# Altium PCB pcb.PcbDoc (part 3 of 3)
Units mm, origin at the board's own origin, x right, y up, seen from the top; angles counter-clockwise.
Board outline 134 x 85 mm, 2 copper layers (Top Layer, Bottom Layer), stack 1.576 mm thick; 95 components, 38 nets, 258 pads, 1810 vias.
Unrouted connection lines stored in the file: 41.
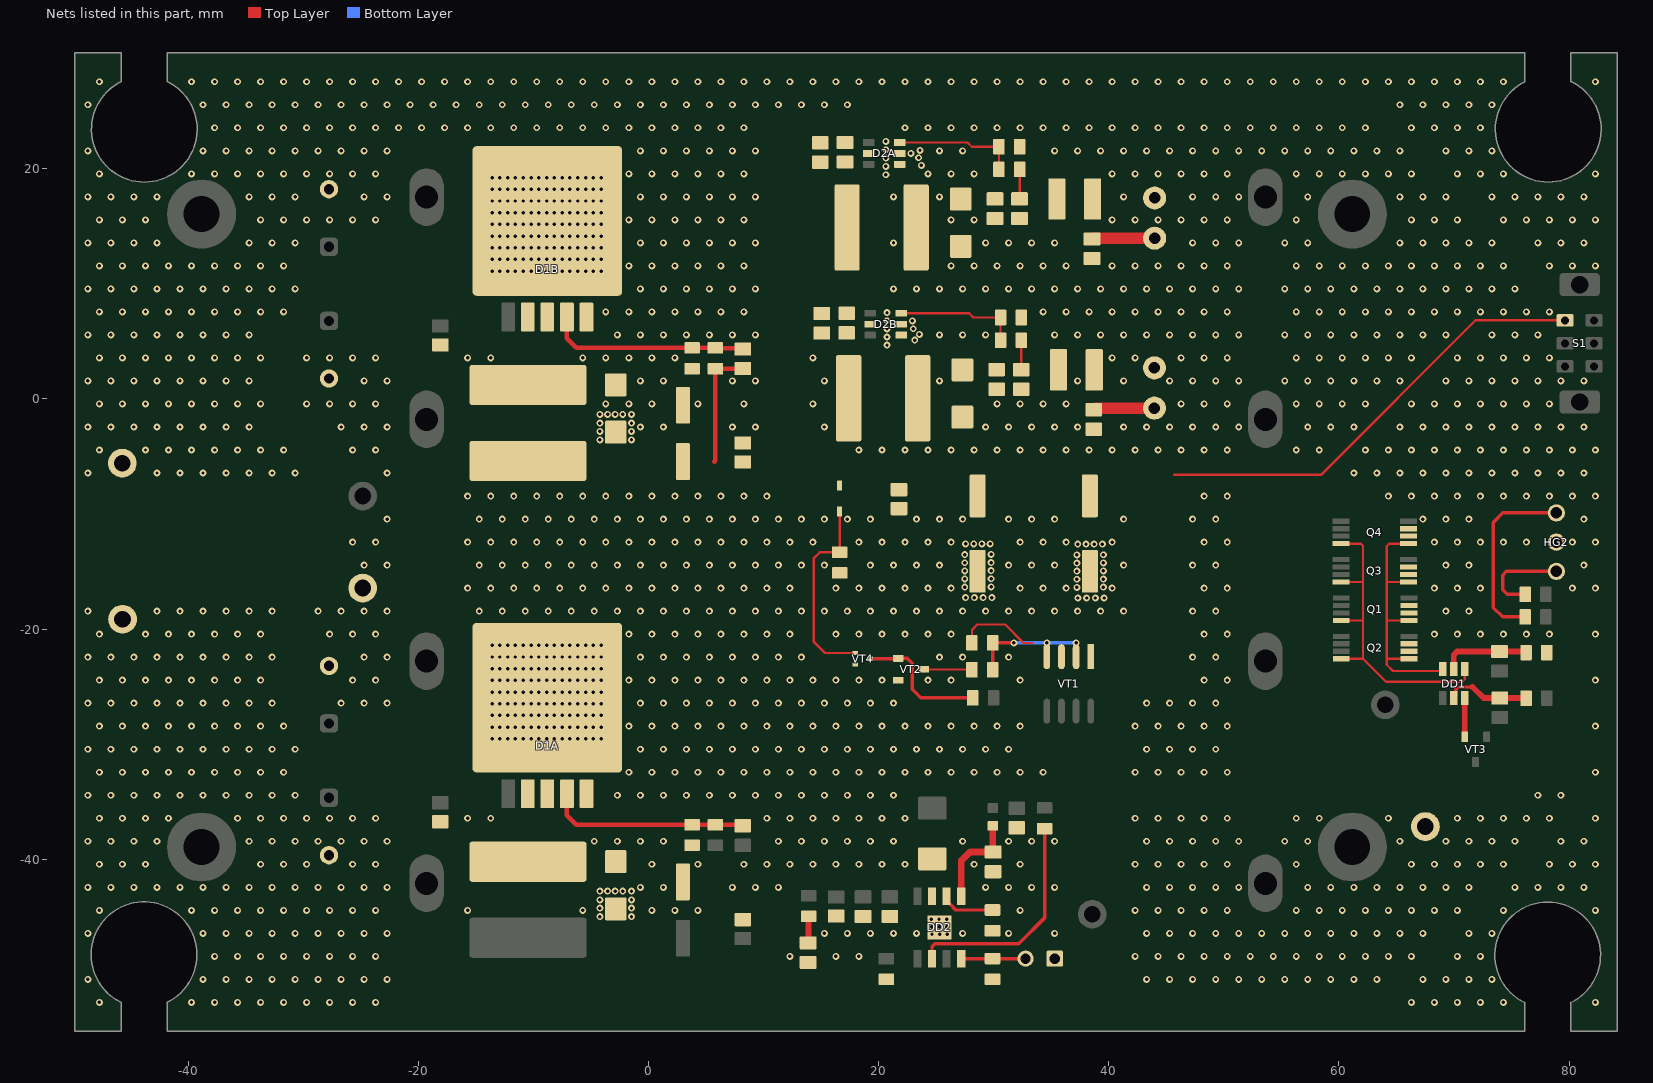
[diagram p2: the nets of this part, all layers, seen from the top]

## Via types
v1: diameter 0.6, hole 0.3, Top Layer to Bottom Layer, tented both sides, 1810 vias

## Nets (pads, with @x,y where several pads share a name; then routed paths per layer and width w, separated by ;. In a path a pad name is that pad's centre, name@x,y a point inside that pad or via, vN(x,y) a via of type N, cw(c..) or ccw(c..) an arc to the next point about the centre after c; other vN are vias at no path point) (continued)
GND: C1A.2 C1B.2 C2A.2 C2B.2 C3A.2 C3B.2 C4A.2 C4B.2 C5A.2 C5B.2 C8.2 C9.2 C10.2 C11.2 C12.2 C13.2 C14.2 C16A.2 C16B.2 C17A.2 C17B.2 C18.2 C20A.2 C20B.2 C21A.2 C21B.2 C22.2 C23A.2 C23B.2 D1A.3 D1A.5 D1A.6 D1B.3 D1B.5 D1B.6 D2A.2 D2B.2 DD2.9 FP4.1 FP7.1 FP12.1 FP13.1 HG2.CC J1.1 Q1.6 Q1.7 Q2.6 Q2.7 Q3.6 Q3.7 Q4.6 Q4.7 R2A.2 R2B.2 R5A.2 R5B.2 R12.1 R15.2 RICHG.1 RNTC.1 RVSET.1 VD1A.AN VD1B.AN VT2.2 VT4.2 X2.2 X3.2
  other v1: -47.708,-52.441 -39.708,-52.441 -37.708,-52.441 -35.708,-52.441 -33.708,-52.441 -31.708,-52.441 -29.708,-52.441 -27.708,-52.441 -25.708,-52.441 -23.708,-52.441 66.292,-52.441 68.292,-52.441 70.292,-52.441 72.292,-52.441 74.292,-52.441 82.292,-52.441 -48.708,-50.441 -38.708,-50.441 -36.708,-50.441 -34.708,-50.441 -32.708,-50.441 -30.708,-50.441 -28.708,-50.441 -26.708,-50.441 -24.708,-50.441 -22.708,-50.441 43.292,-50.441 45.292,-50.441 47.292,-50.441 49.292,-50.441 51.292,-50.441 53.292,-50.441 55.292,-50.441 57.292,-50.441 59.292,-50.441 61.292,-50.441 63.292,-50.441 67.292,-50.441 69.292,-50.441 71.292,-50.441 73.292,-50.441 -37.708,-48.441 -35.708,-48.441 -33.708,-48.441 -31.708,-48.441 -29.708,-48.441 -27.708,-48.441 -25.708,-48.441 -23.708,-48.441 12.292,-48.441 16.292,-48.441 18.292,-48.441 42.292,-48.441 44.292,-48.441 46.292,-48.441 48.292,-48.441 50.292,-48.441 52.292,-48.441 54.292,-48.441 56.292,-48.441 58.292,-48.441 60.292,-48.441 62.292,-48.441 64.292,-48.441 66.292,-48.441 70.292,-48.441 72.292,-48.441 24.638,-46.507 25.298,-46.507 25.959,-46.507 -48.708,-46.441 -38.708,-46.441 -36.708,-46.441 -34.708,-46.441 -32.708,-46.441 -30.708,-46.441 -28.708,-46.441 -26.708,-46.441 -24.708,-46.441 -22.708,-46.441 15.292,-46.441 17.292,-46.441 19.292,-46.441 21.292,-46.441 23.292,-46.441 27.292,-46.441 31.292,-46.441 35.292,-46.441 43.292,-46.441 45.292,-46.441 47.292,-46.441 49.292,-46.441 51.292,-46.441 53.292,-46.441 55.292,-46.441 57.292,-46.441 59.292,-46.441 61.292,-46.441 63.292,-46.441 65.292,-46.441 67.292,-46.441 71.292,-46.441 73.292,-46.441 24.613,-45.872 25.273,-45.872 25.933,-45.872 24.587,-45.212 25.248,-45.212 25.908,-45.212 -4.216,-44.983 -1.473,-44.983 -47.708,-44.441 -39.708,-44.441 -37.708,-44.441 -35.708,-44.441 -33.708,-44.441 -31.708,-44.441 -29.708,-44.441 -27.708,-44.441 -25.708,-44.441 -23.708,-44.441 -15.708,-44.441 -5.708,-44.441 0.292,-44.441 2.292,-44.441 4.292,-44.441 32.292,-44.441 42.292,-44.441 44.292,-44.441 46.292,-44.441 48.292,-44.441 50.292,-44.441 56.292,-44.441 58.292,-44.441 60.292,-44.441 62.292,-44.441 64.292,-44.441 66.292,-44.441 68.292,-44.441 70.292,-44.441 74.292,-44.441 82.292,-44.441 -4.216,-44.247 -1.473,-44.247 -4.216,-43.536 -1.473,-43.536 -4.216,-42.774 -3.556,-42.774 -2.896,-42.774 -2.235,-42.774 -1.473,-42.774 -48.708,-42.441 -46.708,-42.441 -44.708,-42.441 -42.708,-42.441 -40.708,-42.441 -38.708,-42.441 -36.708,-42.441 -34.708,-42.441 -32.708,-42.441 -30.708,-42.441 -28.708,-42.441 -26.708,-42.441 -24.708,-42.441 -22.708,-42.441 -0.708,-42.441 1.292,-42.441 7.292,-42.441 9.292,-42.441 11.292,-42.441 29.292,-42.441 31.292,-42.441 33.292,-42.441 35.292,-42.441 43.292,-42.441 45.292,-42.441 47.292,-42.441 49.292,-42.441 51.292,-42.441 57.292,-42.441 59.292,-42.441 61.292,-42.441 63.292,-42.441 65.292,-42.441 67.292,-42.441 69.292,-42.441 71.292,-42.441 75.292,-42.441 77.292,-42.441 79.292,-42.441 81.292,-42.441 -47.708,-40.441 -45.708,-40.441 -43.708,-40.441 -33.708,-40.441 -31.708,-40.441 -29.708,-40.441 -25.708,-40.441 -23.708,-40.441 0.292,-40.441 4.292,-40.441 8.292,-40.441 10.292,-40.441 12.292,-40.441 14.292,-40.441 16.292,-40.441 18.292,-40.441 20.292,-40.441 22.292,-40.441 28.292,-40.441 32.292,-40.441 42.292,-40.441 44.292,-40.441 46.292,-40.441 48.292,-40.441 50.292,-40.441 56.292,-40.441 66.292,-40.441 68.292,-40.441 70.292,-40.441 72.292,-40.441 74.292,-40.441 78.292,-40.441 80.292,-40.441 82.292,-40.441 -48.708,-38.441 -46.708,-38.441 -44.708,-38.441 -42.708,-38.441 -34.708,-38.441 -32.708,-38.441 -30.708,-38.441 -28.708,-38.441 -26.708,-38.441 -24.708,-38.441 -22.708,-38.441 -4.708,-38.441 -2.708,-38.441 -0.708,-38.441 1.292,-38.441 11.292,-38.441 13.292,-38.441 15.292,-38.441 17.292,-38.441 19.292,-38.441 21.292,-38.441 27.292,-38.441 31.292,-38.441 33.292,-38.441 35.292,-38.441 43.292,-38.441 45.292,-38.441 47.292,-38.441 49.292,-38.441 51.292,-38.441 55.292,-38.441 57.292,-38.441 65.292,-38.441 69.292,-38.441 71.292,-38.441 73.292,-38.441 75.292,-38.441 79.292,-38.441 81.292,-38.441 -47.708,-36.441 -45.708,-36.441 -43.708,-36.441 -41.708,-36.441 -35.708,-36.441 -33.708,-36.441 -31.708,-36.441 -29.708,-36.441 -27.708,-36.441 -25.708,-36.441 -23.708,-36.441 -15.708,-36.441 -13.708,-36.441 10.292,-36.441 12.292,-36.441 14.292,-36.441 16.292,-36.441 18.292,-36.441 20.292,-36.441 22.292,-36.441 42.292,-36.441 44.292,-36.441 46.292,-36.441 48.292,-36.441 50.292,-36.441 56.292,-36.441 58.292,-36.441 64.292,-36.441 70.292,-36.441 72.292,-36.441 74.292,-36.441 76.292,-36.441 78.292,-36.441 82.292,-36.441 -48.708,-34.441 -46.708,-34.441 -44.708,-34.441 -42.708,-34.441 -40.708,-34.441 -38.708,-34.441 -36.708,-34.441 -34.708,-34.441 -32.708,-34.441 -30.708,-34.441 -2.708,-34.441 -0.708,-34.441 1.292,-34.441 3.292,-34.441 5.292,-34.441 7.292,-34.441 9.292,-34.441 11.292,-34.441 13.292,-34.441 15.292,-34.441 17.292,-34.441 19.292,-34.441 21.292,-34.441 77.292,-34.441 79.292,-34.441 -47.708,-32.441 -45.708,-32.441 -43.708,-32.441 -41.708,-32.441 -39.708,-32.441 -37.708,-32.441 -35.708,-32.441 -33.708,-32.441 -31.708,-32.441 -1.708,-32.441 0.292,-32.441 2.292,-32.441 4.292,-32.441 6.292,-32.441 8.292,-32.441 10.292,-32.441 12.292,-32.441 14.292,-32.441 16.292,-32.441 18.292,-32.441 20.292,-32.441 22.292,-32.441 24.292,-32.441 26.292,-32.441 28.292,-32.441 30.292,-32.441 32.292,-32.441 34.292,-32.441 42.292,-32.441 44.292,-32.441 46.292,-32.441 48.292,-32.441 50.292,-32.441 82.292,-32.441 -48.708,-30.441 -46.708,-30.441 -44.708,-30.441 -42.708,-30.441 -40.708,-30.441 -38.708,-30.441 -36.708,-30.441 -34.708,-30.441 -32.708,-30.441 -30.708,-30.441 -0.708,-30.441 1.292,-30.441 3.292,-30.441 5.292,-30.441 7.292,-30.441 9.292,-30.441 11.292,-30.441 13.292,-30.441 15.292,-30.441 17.292,-30.441 19.292,-30.441 21.292,-30.441 23.292,-30.441 25.292,-30.441 27.292,-30.441 29.292,-30.441 31.292,-30.441 43.292,-30.441 45.292,-30.441 47.292,-30.441 49.292,-30.441 -13.589,-29.54 -12.912,-29.54 -12.236,-29.54 -11.559,-29.54 -10.882,-29.54 -10.205,-29.54 -9.529,-29.54 -8.852,-29.54 -8.175,-29.54 -7.498,-29.54 -6.822,-29.54 -6.145,-29.54 -5.468,-29.54 -4.792,-29.54 -4.115,-29.54 -13.589,-28.524 -12.912,-28.524 -12.236,-28.524 -11.559,-28.524 -10.882,-28.524 -10.205,-28.524 -9.529,-28.524 -8.852,-28.524 -8.175,-28.524 -7.498,-28.524 -6.822,-28.524 -6.145,-28.524 -5.468,-28.524 -4.792,-28.524 -4.115,-28.524 -47.708,-28.441 -45.708,-28.441 -43.708,-28.441 -41.708,-28.441 -39.708,-28.441 -37.708,-28.441 -35.708,-28.441 -33.708,-28.441 -31.708,-28.441 -1.708,-28.441 0.292,-28.441 2.292,-28.441 4.292,-28.441 6.292,-28.441 8.292,-28.441 10.292,-28.441 12.292,-28.441 14.292,-28.441 16.292,-28.441 18.292,-28.441 20.292,-28.441 22.292,-28.441 24.292,-28.441 26.292,-28.441 28.292,-28.441 30.292,-28.441 32.292,-28.441 42.292,-28.441 44.292,-28.441 46.292,-28.441 48.292,-28.441 50.292,-28.441 82.292,-28.441 -13.589,-27.508 -12.912,-27.508 -12.236,-27.508 -11.559,-27.508 -10.882,-27.508 -10.205,-27.508 -9.529,-27.508 -8.852,-27.508 -8.175,-27.508 -7.498,-27.508 -6.822,-27.508 -6.145,-27.508 -5.468,-27.508 -4.792,-27.508 -4.115,-27.508 -13.589,-26.492 -12.912,-26.492 -12.236,-26.492 -11.559,-26.492 -10.882,-26.492 -10.205,-26.492 -9.529,-26.492 -8.852,-26.492 -8.175,-26.492 -7.498,-26.492 -6.822,-26.492 -6.145,-26.492 -5.468,-26.492 -4.792,-26.492 -4.115,-26.492 -48.708,-26.441 -46.708,-26.441 -44.708,-26.441 -42.708,-26.441 -40.708,-26.441 -38.708,-26.441 -36.708,-26.441 -34.708,-26.441 -32.708,-26.441 -26.708,-26.441 -24.708,-26.441 -22.708,-26.441 -0.708,-26.441 1.292,-26.441 3.292,-26.441 5.292,-26.441 7.292,-26.441 9.292,-26.441 11.292,-26.441 13.292,-26.441 15.292,-26.441 17.292,-26.441 19.292,-26.441 21.292,-26.441 43.292,-26.441 45.292,-26.441 47.292,-26.441 49.292,-26.441 -13.589,-25.476 -12.912,-25.476 -12.236,-25.476 -11.559,-25.476 -10.882,-25.476 -10.205,-25.476 -9.529,-25.476 -8.852,-25.476 -8.175,-25.476 -7.498,-25.476 -6.822,-25.476 -6.145,-25.476 -5.468,-25.476 -4.792,-25.476 -4.115,-25.476 -47.708,-24.441 -45.708,-24.441 -43.708,-24.441 -41.708,-24.441 -39.708,-24.441 -37.708,-24.441 -35.708,-24.441 -33.708,-24.441 -25.708,-24.441 -23.708,-24.441 -13.589,-24.46 -12.912,-24.46 -12.236,-24.46 -11.559,-24.46 -10.882,-24.46 -10.205,-24.46 -9.529,-24.46 -8.852,-24.46 -8.175,-24.46 -7.498,-24.46 -6.822,-24.46 -6.145,-24.46 -5.468,-24.46 -4.792,-24.46 -4.115,-24.46 -1.708,-24.441 0.292,-24.441 2.292,-24.441 4.292,-24.441 6.292,-24.441 8.292,-24.441 10.292,-24.441 12.292,-24.441 14.292,-24.441 16.292,-24.441 18.292,-24.441 20.292,-24.441 24.292,-24.441 26.292,-24.441 32.292,-24.441 48.292,-24.441 50.292,-24.441 82.292,-24.441 -13.589,-23.444 -12.912,-23.444 -12.236,-23.444 -11.559,-23.444 -10.882,-23.444 -10.205,-23.444 -9.529,-23.444 -8.852,-23.444 -8.175,-23.444 -7.498,-23.444 -6.822,-23.444 -6.145,-23.444 -5.468,-23.444 -4.792,-23.444 -4.115,-23.444 -48.708,-22.441 -46.708,-22.441 -44.708,-22.441 -42.708,-22.441 -40.708,-22.441 -38.708,-22.441 -36.708,-22.441 -34.708,-22.441 -32.708,-22.441 -24.708,-22.441 -22.708,-22.441 -0.708,-22.441 1.292,-22.441 3.292,-22.441 5.292,-22.441 7.292,-22.441 9.292,-22.441 11.292,-22.441 13.292,-22.441 25.292,-22.441 27.292,-22.441 31.292,-22.441 47.292,-22.441 49.292,-22.441 -13.589,-22.428 -12.912,-22.428 -12.236,-22.428 -11.559,-22.428 -10.882,-22.428 -10.205,-22.428 -9.529,-22.428 -8.852,-22.428 -8.175,-22.428 -7.498,-22.428 -6.822,-22.428 -6.145,-22.428 -5.468,-22.428 -4.792,-22.428 -4.115,-22.428 -13.589,-21.412 -12.912,-21.412 -12.236,-21.412 -11.559,-21.412 -10.882,-21.412 -10.205,-21.412 -9.529,-21.412 -8.852,-21.412 -8.175,-21.412 -7.498,-21.412 -6.822,-21.412 -6.145,-21.412 -5.468,-21.412 -4.792,-21.412 -4.115,-21.412 -47.708,-20.441 -43.708,-20.441 -41.708,-20.441 -39.708,-20.441 -37.708,-20.441 -35.708,-20.441 -33.708,-20.441 -27.708,-20.441 -25.708,-20.441 -23.708,-20.441 -1.708,-20.441 0.292,-20.441 2.292,-20.441 4.292,-20.441 6.292,-20.441 8.292,-20.441 10.292,-20.441 12.292,-20.441 16.292,-20.441 18.292,-20.441 20.292,-20.441 22.292,-20.441 24.292,-20.441 26.292,-20.441 48.292,-20.441 50.292,-20.441 68.292,-20.441 70.292,-20.441 72.292,-20.441 74.292,-20.441 76.292,-20.441 78.292,-20.441 82.292,-20.441 -48.708,-18.441 -42.708,-18.441 -40.708,-18.441 -38.708,-18.441 -36.708,-18.441 -34.708,-18.441 -32.708,-18.441 -28.708,-18.441 -26.708,-18.441 -24.708,-18.441 -22.708,-18.441 -14.708,-18.441 -12.708,-18.441 -10.708,-18.441 -8.708,-18.441 -6.708,-18.441 -4.708,-18.441 -2.708,-18.441 -0.708,-18.441 1.292,-18.441 3.292,-18.441 5.292,-18.441 7.292,-18.441 9.292,-18.441 11.292,-18.441 13.292,-18.441 15.292,-18.441 17.292,-18.441 19.292,-18.441 21.292,-18.441 23.292,-18.441 25.292,-18.441 27.292,-18.441 29.292,-18.441 31.292,-18.441 33.292,-18.441 35.292,-18.441 37.292,-18.441 39.292,-18.441 41.292,-18.441 47.292,-18.441 49.292,-18.441 69.292,-18.441 71.292,-18.441 37.313,-17.301 38.075,-17.301 38.837,-17.301 39.599,-17.301 27.559,-17.272 28.321,-17.272 29.083,-17.272 29.845,-17.272 -15.708,-16.441 -13.708,-16.441 -11.708,-16.441 -9.708,-16.441 -7.708,-16.441 -5.708,-16.441 -3.708,-16.441 -1.708,-16.441 0.292,-16.441 2.292,-16.441 4.292,-16.441 6.292,-16.441 8.292,-16.441 10.292,-16.441 12.292,-16.441 16.292,-16.441 18.292,-16.441 20.292,-16.441 22.292,-16.441 24.292,-16.441 26.292,-16.441 32.292,-16.441 34.292,-16.441 36.292,-16.441 40.292,-16.441 48.292,-16.441 50.292,-16.441 68.292,-16.441 70.292,-16.441 72.292,-16.441 80.292,-16.441 82.292,-16.441 37.236,-16.38 27.483,-16.351 39.528,-16.358 29.775,-16.329 37.236,-15.675 39.528,-15.655 27.483,-15.646 29.775,-15.626 37.236,-14.97 27.483,-14.942 39.528,-14.952 29.775,-14.923 -24.708,-14.441 -22.708,-14.441 -14.708,-14.441 -12.708,-14.441 -10.708,-14.441 -8.708,-14.441 -6.708,-14.441 -4.708,-14.441 -2.708,-14.441 -0.708,-14.441 1.292,-14.441 3.292,-14.441 5.292,-14.441 7.292,-14.441 9.292,-14.441 11.292,-14.441 13.292,-14.441 15.292,-14.441 19.292,-14.441 21.292,-14.441 23.292,-14.441 25.292,-14.441 31.292,-14.441 33.292,-14.441 35.292,-14.441 41.292,-14.441 47.292,-14.441 49.292,-14.441 69.292,-14.441 71.292,-14.441 81.292,-14.441 37.236,-14.266 27.483,-14.237 39.528,-14.249 29.775,-14.22 37.236,-13.561 39.528,-13.546 27.483,-13.532 29.775,-13.518 37.306,-12.624 38.019,-12.624 38.733,-12.624 39.446,-12.624 27.552,-12.595 28.266,-12.595 28.979,-12.595 29.693,-12.595 -25.708,-12.441 -23.708,-12.441 -15.708,-12.441 -13.708,-12.441 -11.708,-12.441 -9.708,-12.441 -7.708,-12.441 -5.708,-12.441 -3.708,-12.441 -1.708,-12.441 0.292,-12.441 2.292,-12.441 4.292,-12.441 6.292,-12.441 8.292,-12.441 10.292,-12.441 12.292,-12.441 14.292,-12.441 18.292,-12.441 20.292,-12.441 22.292,-12.441 24.292,-12.441 26.292,-12.441 32.292,-12.441 34.292,-12.441 36.292,-12.441 40.292,-12.441 48.292,-12.441 50.292,-12.441 68.292,-12.441 70.292,-12.441 72.292,-12.441 74.292,-12.441 76.292,-12.441 80.292,-12.441 82.292,-12.441 -22.708,-10.441 -14.708,-10.441 -12.708,-10.441 -10.708,-10.441 -8.708,-10.441 -6.708,-10.441 -4.708,-10.441 -2.708,-10.441 -0.708,-10.441 1.292,-10.441 3.292,-10.441 5.292,-10.441 7.292,-10.441 9.292,-10.441 11.292,-10.441 13.292,-10.441 15.292,-10.441 17.292,-10.441 19.292,-10.441 23.292,-10.441 25.292,-10.441 27.292,-10.441 31.292,-10.441 33.292,-10.441 35.292,-10.441 41.292,-10.441 47.292,-10.441 49.292,-10.441 67.292,-10.441 69.292,-10.441 71.292,-10.441 81.292,-10.441 -15.708,-8.441 -13.708,-8.441 -11.708,-8.441 -9.708,-8.441 -7.708,-8.441 -5.708,-8.441 -3.708,-8.441 -1.708,-8.441 0.292,-8.441 2.292,-8.441 4.292,-8.441 6.292,-8.441 8.292,-8.441 10.292,-8.441 48.292,-8.441 50.292,-8.441 64.292,-8.441 66.292,-8.441 68.292,-8.441 70.292,-8.441 72.292,-8.441 74.292,-8.441 76.292,-8.441 78.292,-8.441 80.292,-8.441 82.292,-8.441 -48.708,-6.441 -42.708,-6.441 -40.708,-6.441 -38.708,-6.441 -36.708,-6.441 -34.708,-6.441 -32.708,-6.441 -30.708,-6.441 -22.708,-6.441 61.292,-6.441 63.292,-6.441 65.292,-6.441 67.292,-6.441 69.292,-6.441 71.292,-6.441 73.292,-6.441 75.292,-6.441 77.292,-6.441 79.292,-6.441 81.292,-6.441 -47.708,-4.441 -43.708,-4.441 -41.708,-4.441 -39.708,-4.441 -37.708,-4.441 -35.708,-4.441 -33.708,-4.441 -31.708,-4.441 -25.708,-4.441 -23.708,-4.441 18.292,-4.441 20.292,-4.441 22.292,-4.441 24.292,-4.441 26.292,-4.441 28.292,-4.441 30.292,-4.441 32.292,-4.441 34.292,-4.441 36.292,-4.441 38.292,-4.441 40.292,-4.441 42.292,-4.441 44.292,-4.441 46.292,-4.441 48.292,-4.441 50.292,-4.441 56.292,-4.441 58.292,-4.441 62.292,-4.441 64.292,-4.441 66.292,-4.441 68.292,-4.441 70.292,-4.441 72.292,-4.441 74.292,-4.441 76.292,-4.441 78.292,-4.441 80.292,-4.441 82.292,-4.441 -4.216,-3.556 -1.473,-3.556 -4.216,-2.819 -1.473,-2.819 -48.708,-2.441 -46.708,-2.441 -44.708,-2.441 -42.708,-2.441 -40.708,-2.441 -38.708,-2.441 -36.708,-2.441 -34.708,-2.441 -26.708,-2.441 -24.708,-2.441 -22.708,-2.441 -0.708,-2.441 1.292,-2.441 7.292,-2.441 9.292,-2.441 15.292,-2.441 29.292,-2.441 31.292,-2.441 33.292,-2.441 35.292,-2.441 37.292,-2.441 41.292,-2.441 43.292,-2.441 45.292,-2.441 47.292,-2.441 49.292,-2.441 51.292,-2.441 57.292,-2.441 59.292,-2.441 61.292,-2.441 65.292,-2.441 67.292,-2.441 69.292,-2.441 71.292,-2.441 73.292,-2.441 75.292,-2.441 77.292,-2.441 79.292,-2.441 81.292,-2.441 -4.216,-2.108 -1.473,-2.108 -4.216,-1.346 -3.556,-1.346 -2.896,-1.346 -2.235,-1.346 -1.473,-1.346 -47.708,-0.441 -45.708,-0.441 -43.708,-0.441 -41.708,-0.441 -39.708,-0.441 -37.708,-0.441 -35.708,-0.441 -33.708,-0.441 -29.708,-0.441 -27.708,-0.441 -25.708,-0.441 -23.708,-0.441 -3.708,-0.441 -1.708,-0.441 0.292,-0.441 4.292,-0.441 8.292,-0.441 14.292,-0.441 30.292,-0.441 32.292,-0.441 34.292,-0.441 36.292,-0.441 46.292,-0.441 48.292,-0.441 50.292,-0.441 56.292,-0.441 58.292,-0.441 60.292,-0.441 62.292,-0.441 66.292,-0.441 68.292,-0.441 70.292,-0.441 72.292,-0.441 74.292,-0.441 76.292,-0.441 78.292,-0.441 -48.708,1.559 -46.708,1.559 -44.708,1.559 -42.708,1.559 -40.708,1.559 -38.708,1.559 -36.708,1.559 -34.708,1.559 -24.708,1.559 -22.708,1.559 -0.708,1.559 1.292,1.559 7.292,1.559 9.292,1.559 15.292,1.559 25.292,1.559 37.292,1.559 41.292,1.559 45.292,1.559 47.292,1.559 49.292,1.559 51.292,1.559 55.292,1.559 57.292,1.559 59.292,1.559 61.292,1.559 63.292,1.559 65.292,1.559 69.292,1.559 71.292,1.559 73.292,1.559 75.292,1.559 77.292,1.559 79.292,1.559 81.292,1.559 -47.708,3.559 -45.708,3.559 -43.708,3.559 -41.708,3.559 -39.708,3.559 -37.708,3.559 -35.708,3.559 -33.708,3.559 -29.708,3.559 -27.708,3.559 -25.708,3.559 -23.708,3.559 -15.708,3.559 -13.708,3.559 -5.708,3.559 -3.708,3.559 -1.708,3.559 0.292,3.559 2.292,3.559 14.292,3.559 40.292,3.559 42.292,3.559 46.292,3.559 48.292,3.559 50.292,3.559 56.292,3.559 58.292,3.559 60.292,3.559 62.292,3.559 64.292,3.559 66.292,3.559 70.292,3.559 72.292,3.559 74.292,3.559 76.292,3.559 78.292,3.559 20.726,4.674 23.139,5.105 20.726,5.378 -48.708,5.559 -46.708,5.559 -44.708,5.559 -42.708,5.559 -40.708,5.559 -38.708,5.559 -36.708,5.559 -34.708,5.559 -2.708,5.559 -0.708,5.559 1.292,5.559 3.292,5.559 5.292,5.559 7.292,5.559 9.292,5.559 25.292,5.559 27.292,5.559 29.292,5.559 35.292,5.559 37.292,5.559 39.292,5.559 41.292,5.559 43.292,5.559 45.292,5.559 47.292,5.559 49.292,5.559 51.292,5.559 55.292,5.559 57.292,5.559 59.292,5.559 61.292,5.559 63.292,5.559 65.292,5.559 67.292,5.559 69.292,5.559 73.292,5.559 75.292,5.559 77.292,5.559 23.546,5.613 20.726,6.083 23.012,6.096 20.726,6.788 22.936,6.782 20.726,7.493 -47.708,7.559 -45.708,7.559 -43.708,7.559 -41.708,7.559 -39.708,7.559 -37.708,7.559 -35.708,7.559 -33.708,7.559 -31.708,7.559 -3.708,7.559 -1.708,7.559 0.292,7.559 2.292,7.559 4.292,7.559 6.292,7.559 8.292,7.559 34.292,7.559 36.292,7.559 38.292,7.559 40.292,7.559 42.292,7.559 44.292,7.559 46.292,7.559 48.292,7.559 50.292,7.559 56.292,7.559 58.292,7.559 60.292,7.559 62.292,7.559 64.292,7.559 66.292,7.559 68.292,7.559 70.292,7.559 72.292,7.559 74.292,7.559 76.292,7.559 78.292,7.559 -48.708,9.559 -46.708,9.559 -44.708,9.559 -42.708,9.559 -40.708,9.559 -38.708,9.559 -36.708,9.559 -34.708,9.559 -32.708,9.559 -30.708,9.559 -0.708,9.559 1.292,9.559 3.292,9.559 5.292,9.559 7.292,9.559 9.292,9.559 21.292,9.559 23.292,9.559 25.292,9.559 27.292,9.559 29.292,9.559 31.292,9.559 33.292,9.559 35.292,9.559 37.292,9.559 39.292,9.559 41.292,9.559 43.292,9.559 45.292,9.559 47.292,9.559 49.292,9.559 51.292,9.559 55.292,9.559 57.292,9.559 59.292,9.559 61.292,9.559 63.292,9.559 65.292,9.559 67.292,9.559 69.292,9.559 71.292,9.559 73.292,9.559 75.292,9.559 -13.589,11.1 -12.912,11.1 -12.236,11.1 -11.559,11.1 -10.882,11.1 -10.205,11.1 -9.529,11.1 -8.852,11.1 -8.175,11.1 -7.498,11.1 -6.822,11.1 -6.145,11.1 -5.468,11.1 -4.792,11.1 -4.115,11.1 -47.708,11.559 -45.708,11.559 -43.708,11.559 -41.708,11.559 -39.708,11.559 -37.708,11.559 -35.708,11.559 -33.708,11.559 -31.708,11.559 -1.708,11.559 0.292,11.559 2.292,11.559 4.292,11.559 6.292,11.559 8.292,11.559 26.292,11.559 28.292,11.559 30.292,11.559 32.292,11.559 34.292,11.559 36.292,11.559 40.292,11.559 42.292,11.559 44.292,11.559 46.292,11.559 48.292,11.559 50.292,11.559 56.292,11.559 58.292,11.559 60.292,11.559 62.292,11.559 64.292,11.559 66.292,11.559 68.292,11.559 70.292,11.559 72.292,11.559 74.292,11.559 78.292,11.559 80.292,11.559 82.292,11.559 -13.589,12.116 -12.912,12.116 -12.236,12.116 -11.559,12.116 -10.882,12.116 -10.205,12.116 -9.529,12.116 -8.852,12.116 -8.175,12.116 -7.498,12.116 -6.822,12.116 -6.145,12.116 -5.468,12.116 -4.792,12.116 -4.115,12.116 -13.589,13.132 -12.912,13.132 -12.236,13.132 -11.559,13.132 -10.882,13.132 -10.205,13.132 -9.529,13.132 -8.852,13.132 -8.175,13.132 -7.498,13.132 -6.822,13.132 -6.145,13.132 -5.468,13.132 -4.792,13.132 -4.115,13.132 -48.708,13.559 -46.708,13.559 -44.708,13.559 -42.708,13.559 -34.708,13.559 -32.708,13.559 -30.708,13.559 -0.708,13.559 1.292,13.559 3.292,13.559 5.292,13.559 7.292,13.559 9.292,13.559 21.292,13.559 29.292,13.559 31.292,13.559 33.292,13.559 35.292,13.559 47.292,13.559 49.292,13.559 51.292,13.559 55.292,13.559 57.292,13.559 65.292,13.559 67.292,13.559 69.292,13.559 71.292,13.559 73.292,13.559 77.292,13.559 79.292,13.559 81.292,13.559 -13.589,14.148 -12.912,14.148 -12.236,14.148 -11.559,14.148 -10.882,14.148 -10.205,14.148 -9.529,14.148 -8.852,14.148 -8.175,14.148 -7.498,14.148 -6.822,14.148 -6.145,14.148 -5.468,14.148 -4.792,14.148 -4.115,14.148 -13.589,15.164 -12.912,15.164 -12.236,15.164 -11.559,15.164 -10.882,15.164 -10.205,15.164 -9.529,15.164 -8.852,15.164 -8.175,15.164 -7.498,15.164 -6.822,15.164 -6.145,15.164 -5.468,15.164 -4.792,15.164 -4.115,15.164 -47.708,15.559 -45.708,15.559 -43.708,15.559 -33.708,15.559 -31.708,15.559 -29.708,15.559 -27.708,15.559 -25.708,15.559 -23.708,15.559 -1.708,15.559 0.292,15.559 2.292,15.559 4.292,15.559 6.292,15.559 8.292,15.559 26.292,15.559 28.292,15.559 40.292,15.559 42.292,15.559 44.292,15.559 46.292,15.559 48.292,15.559 50.292,15.559 56.292,15.559 66.292,15.559 68.292,15.559 70.292,15.559 74.292,15.559 76.292,15.559 78.292,15.559 80.292,15.559 82.292,15.559 -13.589,16.18 -12.912,16.18 -12.236,16.18 -11.559,16.18 -10.882,16.18 -10.205,16.18 -9.529,16.18 -8.852,16.18 -8.175,16.18 -7.498,16.18 -6.822,16.18 -6.145,16.18 -5.468,16.18 -4.792,16.18 -4.115,16.18 -13.589,17.196 -12.912,17.196 -12.236,17.196 -11.559,17.196 -10.882,17.196 -10.205,17.196 -9.529,17.196 -8.852,17.196 -8.175,17.196 -7.498,17.196 -6.822,17.196 -6.145,17.196 -5.468,17.196 -4.792,17.196 -4.115,17.196 -48.708,17.559 -46.708,17.559 -44.708,17.559 -42.708,17.559 -34.708,17.559 -32.708,17.559 -30.708,17.559 -24.708,17.559 -22.708,17.559 -0.708,17.559 1.292,17.559 3.292,17.559 5.292,17.559 7.292,17.559 9.292,17.559 21.292,17.559 25.292,17.559 41.292,17.559 47.292,17.559 49.292,17.559 51.292,17.559 57.292,17.559 65.292,17.559 67.292,17.559 69.292,17.559 73.292,17.559 75.292,17.559 77.292,17.559 79.292,17.559 81.292,17.559 -13.589,18.212 -12.912,18.212 -12.236,18.212 -11.559,18.212 -10.882,18.212 -10.205,18.212 -9.529,18.212 -8.852,18.212 -8.175,18.212 -7.498,18.212 -6.822,18.212 -6.145,18.212 -5.468,18.212 -4.792,18.212 -4.115,18.212 -13.589,19.228 -12.912,19.228 -12.236,19.228 -11.559,19.228 -10.882,19.228 -10.205,19.228 -9.529,19.228 -8.852,19.228 -8.175,19.228 -7.498,19.228 -6.822,19.228 -6.145,19.228 -5.468,19.228 -4.792,19.228 -4.115,19.228 20.625,19.482 -47.708,19.559 -39.708,19.559 -37.708,19.559 -35.708,19.559 -33.708,19.559 -31.708,19.559 -29.708,19.559 -27.708,19.559 -25.708,19.559 -23.708,19.559 -1.708,19.559 0.292,19.559 2.292,19.559 4.292,19.559 6.292,19.559 8.292,19.559 24.292,19.559 26.292,19.559 28.292,19.559 40.292,19.559 42.292,19.559 44.292,19.559 46.292,19.559 48.292,19.559 50.292,19.559 56.292,19.559 58.292,19.559 60.292,19.559 62.292,19.559 64.292,19.559 66.292,19.559 70.292,19.559 72.292,19.559 74.292,19.559 82.292,19.559 20.625,20.206 23.724,20.295 20.625,20.93 23.47,20.955 22.809,21.336 -48.708,21.559 -38.708,21.559 -36.708,21.559 -34.708,21.559 -32.708,21.559 -30.708,21.559 -28.708,21.559 -26.708,21.559 -24.708,21.559 -22.708,21.559 -0.708,21.559 1.292,21.559 3.292,21.559 5.292,21.559 7.292,21.559 9.292,21.559 25.292,21.559 27.292,21.559 35.292,21.559 37.292,21.559 39.292,21.559 41.292,21.559 43.292,21.559 45.292,21.559 47.292,21.559 49.292,21.559 51.292,21.559 53.292,21.559 55.292,21.559 57.292,21.559 59.292,21.559 61.292,21.559 63.292,21.559 65.292,21.559 69.292,21.559 71.292,21.559 73.292,21.559 23.597,21.59 20.625,21.653 20.625,22.377 -37.708,23.559 -35.708,23.559 -33.708,23.559 -31.708,23.559 -29.708,23.559 -27.708,23.559 -25.708,23.559 -23.708,23.559 -21.708,23.559 -19.708,23.559 -17.708,23.559 -15.708,23.559 -13.708,23.559 -11.708,23.559 -9.708,23.559 -7.708,23.559 -5.708,23.559 -3.708,23.559 -1.708,23.559 0.292,23.559 2.292,23.559 4.292,23.559 6.292,23.559 8.292,23.559 22.292,23.559 24.292,23.559 26.292,23.559 28.292,23.559 30.292,23.559 32.292,23.559 34.292,23.559 36.292,23.559 38.292,23.559 40.292,23.559 42.292,23.559 44.292,23.559 46.292,23.559 48.292,23.559 50.292,23.559 52.292,23.559 54.292,23.559 56.292,23.559 58.292,23.559 60.292,23.559 62.292,23.559 66.292,23.559 68.292,23.559 70.292,23.559 72.292,23.559 -48.708,25.559 -38.708,25.559 -36.708,25.559 -34.708,25.559 -32.708,25.559 -30.708,25.559 -28.708,25.559 -26.708,25.559 -24.708,25.559 -22.708,25.559 -20.708,25.559 -18.708,25.559 -16.708,25.559 -14.708,25.559 -12.708,25.559 -10.708,25.559 -8.708,25.559 -6.708,25.559 -4.708,25.559 -2.708,25.559 -0.708,25.559 1.292,25.559 3.292,25.559 5.292,25.559 7.292,25.559 9.292,25.559 11.292,25.559 13.292,25.559 15.292,25.559 17.292,25.559 65.292,25.559 67.292,25.559 69.292,25.559 71.292,25.559 73.292,25.559 -47.708,27.559 -39.708,27.559 -37.708,27.559 -35.708,27.559 -33.708,27.559 -31.708,27.559 -29.708,27.559 -27.708,27.559 -25.708,27.559 -23.708,27.559 -21.708,27.559 -19.708,27.559 -17.708,27.559 -15.708,27.559 -13.708,27.559 -11.708,27.559 -9.708,27.559 -7.708,27.559 -5.708,27.559 -3.708,27.559 -1.708,27.559 0.292,27.559 2.292,27.559 4.292,27.559 6.292,27.559 8.292,27.559 10.292,27.559 12.292,27.559 14.292,27.559 16.292,27.559 18.292,27.559 20.292,27.559 22.292,27.559 24.292,27.559 26.292,27.559 28.292,27.559 30.292,27.559 32.292,27.559 34.292,27.559 36.292,27.559 38.292,27.559 40.292,27.559 42.292,27.559 44.292,27.559 46.292,27.559 48.292,27.559 50.292,27.559 52.292,27.559 54.292,27.559 56.292,27.559 58.292,27.559 60.292,27.559 62.292,27.559 64.292,27.559 66.292,27.559 68.292,27.559 70.292,27.559 72.292,27.559 74.292,27.559 82.292,27.559
ICHG: DD2.6 RICHG.2 | length 4.7
  Top Layer w0.3: DD2.6@25.908,-43.211 25.908,-43.624 26.108,-43.824 26.12,-43.824 26.71,-44.414 RICHG.2@29.897,-44.414
MODEM_PWR: C5B.1 L4B.2 X2.1 | length 5.3
  Top Layer w1: C5B.1@38.684,-0.942 38.824,-0.802 X2.1@43.967,-0.802
NetC3A_1: C3A.1 C4A.1 L4A.1 R1A.1 VD2A.CA | length 2.6
  Top Layer w0.2: C3A.1@32.245,17.383 32.256,17.394 R1A.1@32.256,19.936
NetC3B_1: C3B.1 C4B.1 L4B.1 R1B.1 VD2B.CA | length 2.6
  Top Layer w0.2: C3B.1@32.385,2.538 32.396,2.549 R1B.1@32.396,5.092
NetC7_2: C7.2 DD1.2 R12.2 | length 7.6
  Top Layer w0.5: DD1.2@69.972,-23.484 69.972,-22.246 70.265,-21.953 76.121,-21.953 R12.2@76.209,-22.041
NetC12_1: C12.1 R7.2 | length 2.3
  Top Layer w0.5: C12.1@13.868,-47.271 13.91,-46.796 13.91,-45.37 R7.2@13.918,-44.97
NetC13_1: C13.1 DD2.5 R9.2 | length 8.4
  Top Layer w0.6: DD2.5@27.178,-43.211 27.178,-40.157 27.952,-39.384 C13.1@29.947,-39.384 29.921,-39.358 R9.2@29.921,-37.097
NetC15_2: C15.2 DD1.5 R11.1 | length 7.4
  Top Layer w0.3: DD1.5@69.972,-25.984 70.147,-25.809 70.147,-25.21 70.323,-25.034 71.617,-25.034 ; R11.1@76.248,-25.992 R11.1@76.26,-26.004
  Top Layer w0.5: 71.617,-25.034 72.576,-25.992 R11.1@76.248,-25.992
NetC19A_1: C19A.1 D1A.4 R4A.2 R5A.1 | length 17.5
  Top Layer w0.4: D1A.4@-7.088,-34.316 -7.088,-36.168 -6.259,-36.997 R5A.1@3.785,-36.997 R4A.2@5.817,-36.997 5.835,-37.015 8.122,-37.015 C19A.1@8.204,-37.097
NetC19B_1: C19B.1 D1B.4 R4B.2 R5B.1 | length 17.5
  Top Layer w0.4: D1B.4@-7.088,7.111 -7.088,5.26 -6.259,4.431 R5B.1@3.785,4.431 R4B.2@5.817,4.431 5.835,4.412 8.122,4.412 C19B.1@8.204,4.331
NetD1A_2: D1A.2 L3A.1 VD1A.CA
NetD1B_2: D1B.2 L3B.1 VD1B.CA
NetD2A_1: D2A.1 L1A.2 VD2A.AN
NetD2A_3: D2A.3 R1A.2 R2A.1 | length 10.8
  Top Layer w0.2: D2A.3@21.835,22.283 27.727,22.283 28.093,21.918 R2A.1@30.456,21.918 R1A.2@30.456,19.936
NetD2B_1: D2B.1 L1B.2 VD2B.AN
NetD2B_3: D2B.3 R1B.2 R2B.1 | length 10.8
  Top Layer w0.2: D2B.3@21.975,7.439 27.867,7.439 28.233,7.073 R2B.1@30.596,7.073 R1B.2@30.596,5.092
NetDD1_1: DD1.1 Q1.4 Q2.4 Q3.4 Q4.4 | length 28.2
  Top Layer w0.2: Q3.4@60.176,-15.904 62.098,-15.904 ; Q4.4@60.176,-12.577 61.904,-12.577 62.098,-12.77 62.098,-15.904 ; Q2.4@60.201,-22.585 62.098,-22.585 ; Q1.4@60.201,-19.257 62.087,-19.257 62.098,-19.268 ; DD1.1@70.922,-23.484 70.922,-24.368 70.708,-24.581 64.095,-24.581 62.098,-22.585 ; 62.098,-22.585 62.098,-19.268 ; 62.098,-19.268 62.098,-15.904
NetDD1_3: DD1.3 Q1.5 Q2.5 Q3.5 Q4.5 | length 23.2
  Top Layer w0.2: 64.267,-19.257 Q1.5@66.077,-19.257 ; Q3.5@66.052,-15.904 64.155,-15.904 ; Q4.5@66.052,-12.577 64.374,-12.577 64.155,-12.796 64.155,-15.904 ; Q2.5@66.077,-22.585 64.171,-22.585 64.155,-22.6 ; DD1.3@69.2,-23.642 64.689,-23.642 64.155,-23.108 64.155,-22.6 ; 64.155,-22.6 64.155,-15.904
NetDD1_6: DD1.6 VT3.2 | length 3.4
  Top Layer w0.2: DD1.6@70.922,-25.984 DD1.6@70.932,-25.994
  Top Layer w0.5: VT3.2@70.932,-29.355 DD1.6@70.932,-25.994
NetDD2_7: DD2.7 L2.1
NetHG2_A1: HG2.A1 R6.1 | length 8.2
  Top Layer w0.3: R6.1@76.189,-16.993 74.625,-16.993 74.219,-16.586 74.219,-15.316 74.549,-14.986 HG2.A1@78.892,-14.986
NetHG2_A2: HG2.A2 R8.1 | length 16.3
  Top Layer w0.3: R8.1@76.189,-18.948 74.219,-18.948 73.406,-18.136 73.406,-10.744 74.244,-9.906 HG2.A2@78.892,-9.906
NetR3_2: R3.2 R10.1 VT1.2 VT1.4 | length 9.6
  Top Layer w0.3: R10.1@29.907,-23.546 R3.2@29.907,-21.209 v1(31.75,-21.209)
  Bottom Layer w0.3: v1(31.75,-21.209) v1(34.62,-21.209) v1(37.16,-21.209)
NetR10_2: R10.2 VT2.3 | length 4.2
  Top Layer w0.2: VT2.3@23.935,-23.52 R10.2@28.081,-23.52
  Top Layer w0.5: VT2.3@23.909,-23.495 VT2.3@23.935,-23.52 ; R10.2@28.081,-23.52 R10.2@28.107,-23.546
NetR14_2: R14.2 VT2.1 VT4.3 | length 11.7
  Top Layer w0.3: VT4.3@19.268,-22.581 19.286,-22.563 21.691,-22.563 VT2.1@21.709,-22.545 22.469,-22.545 22.911,-22.987 22.911,-25.222 23.673,-25.984 R14.2@28.183,-25.984
NetR15_1: R15.1 VD3.AN VT4.1 | length 17.3
  Top Layer w0.2: VD3.AN@16.612,-9.786 R15.1@16.612,-13.324 14.895,-13.324 14.351,-13.868 14.351,-21.082 15.35,-22.081 VT4.1@17.968,-22.081
NTC: DD2.4 J1.2 RNTC.2 | length 5.6
  Top Layer w0.2: DD2.4@27.178,-48.635 DD2.4@27.184,-48.641
  Top Layer w0.3: DD2.4@27.184,-48.641 J1.2@32.766,-48.641
ROUTER_PWR: C5A.1 L4A.2 X3.1 | length 5.5
  Top Layer w0.2: C5A.1@38.544,13.903 C5A.1@38.603,13.962
  Top Layer w1: C5A.1@38.603,13.962 X3.1@43.985,13.962 X3.1@43.966,13.943
STEP_UP_IN: C1A.1 C1B.1 C2A.1 C2B.1 C8.1 C17B.1 C18.1 C19B.2 C22.1 C23B.1 D2A.5 D2B.5 L1A.1 L1B.1 L3B.2 R3.1 R4B.1 S1.4 VD3.CA VT1.1 VT1.3 | length 57.3
  Top Layer w0.2: R3.1@28.107,-21.209 28.107,-20.077 28.575,-19.609 30.998,-19.609 32.599,-21.209 33.341,-21.209 ; 45.669,-6.604 58.445,-6.604 71.875,6.826 S1.4@79.649,6.826
  Top Layer w0.4: 5.74,-5.436 5.817,-5.359 R4B.1@5.817,2.631 C19B.2@8.204,2.631
TEST: DD2.2 R13.1 | length 19.6
  Top Layer w0.3: DD2.2@24.638,-48.635 24.638,-47.6 24.879,-47.358 32.169,-47.358 34.417,-45.11 R13.1@34.417,-37.349
pads on no net: D2A.6 D2B.6 DD1.4 Q1.1 Q1.8 Q2.1 Q2.8 Q3.1 Q3.8 Q4.1 Q4.8 S1.1 S1.2 S1.3 S1.6 S1.7

## Polygon pours and split planes (outlines as drawn)
GND on Top Layer "NONET_L-01_P-001" (solid, pour order 76): -49.835,30.06 -49.835,-54.94 84.165,-54.94 84.165,30.06
BGND on Top Layer "NONET_L-01_P-001" (solid, pour order 63): 51.165,-8.94 63.165,-8.94 63.165,-22.94 80.165,-22.94 80.165,-31.94 51.165,-31.94
STEP_UP_IN on Top Layer "NONET_L-01_P-001" (solid, pour order 62): 32.969,-20.396 32.969,-24.46 46.685,-24.46 46.685,-5.156 41.605,-5.156 41.605,-8.204 42.113,-8.712 42.113,-20.396
+4V2_BAT on Top Layer "NONET_L-01_P-001" (solid, pour order 60): 32.969,-25.73 40.996,-25.73 40.996,-36.144 36.017,-36.144 36.017,-30.556 32.969,-30.556
STEP_UP_IN on Top Layer "NONET_L-01_P-001" (solid, pour order 69): 15.596,21.692 13.767,21.692 13.767,-2.083 16.84,-5.156 42.24,-5.156 42.24,-8.204 11.633,-8.204 10.592,-7.163 10.592,23.8 15.596,23.8
STEP_UP_IN on Top Layer "NONET_L-01_P-001" (solid, pour order 65): 16.141,11.289 16.141,18.629 16.954,19.442 18.097,19.442 18.097,21.677 14.185,21.677 14.185,23.8 20.078,23.8 20.078,18.909 18.376,17.207 18.376,11.187 18.3,11.111 16.243,11.111
STEP_UP_IN on Top Layer "NONET_L-01_P-001" (solid, pour order 68): 16.281,-3.556 16.281,3.785 17.094,4.597 18.237,4.597 18.237,6.833 13.614,6.833 13.614,8.611 20.168,8.611 20.168,4.013 18.517,2.362 18.517,-3.658 18.44,-3.734 16.383,-3.734
5V_CHARGER on Top Layer "NONET_L-01_P-001" (solid, pour order 74): 7.518,-46.33 8.331,-46.33 12.649,-42.012 23.698,-42.012 23.698,-44.069 13.97,-44.069 9.398,-48.641 7.518,-48.641
+4V2_BAT on Top Layer "NONET_L-01_P-001" (solid, pour order 75): 22.86,-32.982 22.86,-36.779 26.238,-36.779 26.238,-36.322 40.691,-36.297 40.996,-36.297 40.996,-32.956
BGND on Bottom Layer "NONET_L-01_P-001" (solid, pour order 59): 51.165,-8.94 63.165,-8.94 63.165,-22.94 80.165,-22.94 80.165,-31.94 51.165,-31.94
+4V2_BAT on Bottom Layer "NONET_L-01_P-001" (solid, pour order 64): -21.562,21.184 -16.662,21.184 -16.662,-47.65 -14.173,-50.14 33.122,-50.14 36.601,-50.14 36.601,-44.882 36.601,-32.969 40.996,-32.969 40.996,-54.661 39.649,-54.661 37.516,-54.661 -22.047,-54.661 -22.047,-43.688
GND on Bottom Layer "NONET_L-01_P-001" (solid, pour order 70): -49.835,30.06 -49.835,-54.94 84.165,-54.94 84.165,30.06
no net on Top Solder "NONET_L-01_P-001" (solid): -15.342,21.311 -2.235,21.311 -2.235,29.693 -15.342,29.693
no net on Top Solder "NONET_L-01_P-001" (solid): -15.291,-19.888 -2.261,-19.888 -2.261,-10.871 -15.291,-10.871
no net on Bottom Solder "NONET_L-01_P-001" (solid, pour order 77): 21.285,-42.24 29.413,-42.24 29.413,-49.86 21.285,-49.86

## Other copper
Top Layer:
  region net STEP_UP_IN: -15.164,-3.632 ccw(c-15.164,-4.013) -15.545,-4.013 -15.545,-6.934 ccw(c-15.291,-6.934) -15.291,-7.188 10.693,-7.188 10.693,-4.902 -4.75,-4.902 cw(c-4.75,-4.267) -5.385,-4.267 -5.385,-3.886 ccw(c-5.639,-3.886) -5.639,-3.632
  region net 5V_CHARGER: -15.164,-45.06 ccw(c-15.164,-45.441) -15.545,-45.441 -15.545,-48.362 ccw(c-15.291,-48.362) -15.291,-48.616 8.839,-48.616 8.839,-46.33 -4.75,-46.33 cw(c-4.75,-45.695) -5.385,-45.695 -5.385,-45.314 ccw(c-5.639,-45.314) -5.639,-45.06
  region net 5V_CHARGER: -15.519,-45.06 ccw(c-15.519,-45.441) -15.9,-45.441 -15.9,-48.362 ccw(c-15.646,-48.362) -15.646,-48.616 8.484,-48.616 ccw(c8.484,-48.108) 8.992,-48.108 8.992,-46.965 ccw(c8.357,-46.965) 8.357,-46.33 -5.105,-46.33 cw(c-5.105,-45.695) -5.74,-45.695 -5.74,-45.314 ccw(c-5.994,-45.314) -5.994,-45.06
  region net NetD1B_2: -11.1,8.56 -11.1,5.385 -13.513,2.972 -15.291,2.972 -15.418,2.845 -15.418,-0.584 -5.385,-0.584 -5.385,0.178 -1.956,0.178 -1.956,2.21 -5.385,2.21 -5.385,2.972 -7.417,2.972 -9.83,5.385 -9.83,8.56
  region net MODEM_PWR: 37.897,4.039 37.897,4.318 37.922,4.343 39.395,4.343 39.472,4.267 39.472,-1.448 39.37,-1.549 38.024,-1.549 37.897,-1.422
  region net NetC3B_1: 26.314,3.531 26.314,1.626 26.416,1.524 29.134,1.524 29.566,1.956 33.731,1.956 34.976,0.711 36.347,0.711 36.347,4.267 36.271,4.343 34.29,4.343 33.452,3.505 28.219,3.505
  pour cut-out: -14.284,-3.334 -6.918,-3.334 -6.918,-0.816 -14.284,-0.816
  region net NetD1A_2: -11.1,-32.868 -11.1,-36.043 -13.513,-38.456 -15.291,-38.456 -15.418,-38.583 -15.418,-42.012 -5.385,-42.012 -5.385,-41.25 -1.956,-41.25 -1.956,-39.218 -5.385,-39.218 -5.385,-38.456 -7.417,-38.456 -9.83,-36.043 -9.83,-32.868
  region net NetD1A_2: -11.1,-32.868 -11.1,-36.043 -13.513,-38.456 -15.291,-38.456 -15.418,-38.583 -15.418,-42.012 -5.385,-42.012 -5.385,-41.25 -1.956,-41.25 -1.956,-39.218 -5.385,-39.218 -5.385,-38.456 -7.417,-38.456 -9.83,-36.043 -9.83,-32.868
  region net NetD2A_1: 21.272,20.687 22.39,20.687 22.39,19.62 23.355,18.655 24.371,18.655 24.371,14.308 28.113,14.308 28.113,12.254 24.371,12.254 24.371,11.136 22.212,11.136 22.161,11.187 22.161,18.502 21.272,19.391
  pour cut-out: 19.253,17.704 19.253,11.1 20.777,11.1 20.777,17.704
  pour cut-out: 22.746,-38.684 26.429,-38.684 26.429,-36.906 22.746,-36.906
  region net NetDD2_7: 24.282,-43.967 24.282,-41.859 23.419,-40.996 23.419,-39.014 23.47,-39.014 23.52,-38.964 25.832,-38.964 25.933,-39.065 25.933,-40.919 24.994,-41.859 24.994,-43.967
  region net 12V_EXT: -29.515,-27.008 -29.515,-35.623 -21.62,-35.623 -12.751,-35.623 -11.582,-35.623 -11.582,-33.456 -11.769,-33.071 -15.197,-33.071 -21.26,-27.008 -23.165,-27.008
  region net 12V_EXT: -29.515,-27.008 -29.515,-35.623 -21.62,-35.623 -12.751,-35.623 -11.612,-35.623 -11.612,-33.096 -15.171,-33.096 -21.26,-27.008 -23.165,-27.008
  region net 12V_EXT: -29.515,14.42 -29.515,5.805 -21.62,5.805 -12.751,5.805 -11.612,5.805 -11.612,8.331 -15.171,8.331 -21.26,14.42 -23.165,14.42
  pour cut-out: -14.148,-44.78 -6.782,-44.78 -6.782,-42.262 -14.148,-42.262
  pour cut-out: -49.835,-7.44 -26.835,-7.44 -26.835,-17.44 -49.835,-17.44
  region net NetC3A_1: 26.174,18.375 26.174,16.47 26.276,16.369 28.994,16.369 29.425,16.8 33.591,16.8 34.836,15.556 36.207,15.556 36.207,19.112 36.131,19.188 34.15,19.188 33.312,18.35 28.079,18.35
  region net ROUTER_PWR: 37.757,18.883 37.757,19.163 37.782,19.188 39.255,19.188 39.331,19.112 39.331,13.397 39.23,13.295 37.884,13.295 37.757,13.422
  region net NetD2B_1: 21.412,5.842 22.53,5.842 22.53,4.775 23.495,3.81 24.511,3.81 24.511,-0.537 28.253,-0.537 28.253,-2.591 24.511,-2.591 24.511,-3.708 22.352,-3.708 22.301,-3.658 22.301,3.658 21.412,4.547
  pour cut-out: 19.761,3.48 19.761,-3.886 21.031,-3.886 21.031,3.48
  pour cut-out: 19.761,2.972 19.761,-3.886 21.031,-3.886 21.031,2.972
Bottom Layer:
  pour cut-out: 22.746,-38.684 26.429,-38.684 26.429,-36.906 22.746,-36.906
  pour cut-out: 19.761,2.972 19.761,-3.886 21.031,-3.886 21.031,2.972
  pour cut-out: 19.253,17.704 19.253,11.1 20.777,11.1 20.777,17.704
  pour cut-out: -14.148,-44.78 -6.782,-44.78 -6.782,-42.262 -14.148,-42.262
  pour cut-out: -14.275,-3.378 -6.909,-3.378 -6.909,-0.86 -14.275,-0.86

## Silkscreen, mask and mechanical layers (free items; w line width, h text height)
Top Overlay:
  text "Uout1" at 41.123,20.015 h1.52
  text "Uout2" at 40.564,4.953 h1.52
Top Solder:
  text "-" at 50.598,16.51 h3 r90
  text "+" at 50.538,13.056 h3 r90
  text "-" at 50.572,1.829 h3 r90
  text "+" at 50.639,-1.803 h3 r90
  text "+" at -20.756,-9.186 h2 r90
  text "12V" at -24.581,-13.186 h2
  text "-" at -21.438,-15.383 h2 r180
  text "@vitech_ua" at -46.422,-41.186 h2 r90
  text "WiFi-UPSv3" at -43.089,-41.186 h2 r90
  text "02/2025 Kyiv" at -33.273,-42.686 h2 r90
  text "4V2" at 39.472,-47.981 h2
Bottom Solder:
  text "BAT-" at 60.858,6.325 h3 r90
  text "BAT+" at -27.158,-14.345 h3
Board:
  lines w0.254: -41.835,27.559 -41.835,30.06 75.165,30.06 76.165,30.06 76.165,27.559 ccw(c78.19,23.435) 80.215,27.559 ; -41.786,27.559 cw(c-43.81,23.435) -45.835,27.559 -45.835,30.06 -49.835,30.06 -49.835,29.06 -49.835,-53.94 -49.835,-54.94 ; 76.116,-52.451 cw(c78.141,-48.327) 80.165,-52.451 80.165,-54.94 84.165,-54.94 84.165,27.06 84.165,30.06 80.165,30.06 80.165,27.559 ; 76.165,-52.44 76.165,-54.94 -41.835,-54.94 -41.835,-52.44 ccw(c-43.835,-48.304) -45.835,-52.44 -45.835,-54.94 -49.835,-54.94 ; -49.835,-54.94 -49.835,-54.94
Title:
  lines w0.1: 108.8,111.4 176.75,111.4
  lines w0.127: -134.879,-77.998 -129.799,-77.998 ; -134.879,-7.513 -129.799,-7.513 ; -134.879,62.972 -129.799,62.972 ; -85.603,-148.483 -85.603,-143.403 ; -85.603,128.377 -85.603,133.457 ; -36.454,-148.483 -36.454,-143.403 ; -36.454,128.377 -36.454,133.457 ; 12.695,-148.483 12.695,-143.403 ; 61.971,-148.483 61.971,-143.403 ; 104.725,-143.375 104.725,-113.375 253.725,-113.375 ; 104.725,-138.375 253.725,-138.375 ; 104.725,-133.375 253.725,-133.375 ; 104.725,-123.375 253.725,-123.375 ; 111.12,-148.483 111.12,-143.403 ; 111.12,128.377 111.12,133.457 ; 119.725,-133.375 119.725,-123.375 ; 160.269,-148.483 160.269,-143.403 ; 160.269,128.377 160.269,133.457 ; 189.725,-143.375 189.725,-133.375 ; 209.545,-148.483 209.545,-143.403 ; 209.545,128.377 209.545,133.457 ; 238.725,-133.375 238.725,-123.375 ; 253.741,-77.998 258.821,-77.998 ; 253.741,-7.513 258.821,-7.513 ; 253.741,62.972 258.821,62.972 ; -134.879,-148.483 258.821,-148.483 258.821,133.457 -134.879,133.457 -134.879,-148.483 ; -129.799,-143.403 253.741,-143.403 253.741,128.377 -129.799,128.377 -129.799,-143.403
  text "1" at -110.842,130.028 h1.78
  text "2" at -61.803,130.028 h1.78
  text "3" at -12.544,130.028 h1.78
  text "5" at 86.025,130.028 h1.78
  text "6" at 135.047,130.028 h1.78
  text "7" at 184.577,130.028 h1.78
  text "8" at 233.599,130.028 h1.78
  text "NOTES: UNLESS OTHERWISE SPECIFIED." at 110.2,112.45 h2.5
  text "1. MATERIAL:BASE MATERIAL LAMINATED EPOXY GLASS (ANY COLOR)" at 110.35,106.4 h2.5
  text "GRADE NEMA FR-4. ALL SIDES 1 OZ COPPER PER MIL-P-13949." at 116.95,101.9 h2.5
  text "AND IS UL APPROVED MFR SOURCE WITH 1.6 mm +-10 PERCENT" at 116.95,98.2 h2.5
  text "A" at -132.974,96.043 h1.78
  text "A" at 255.646,96.043 h1.78
  text "2. SOLDER PLATE PER QQ-S-571." at 110.35,93.9 h2.5
  text "3. SILKSCREEN IS ABSENT." at 110.35,89.9 h2.5
  text "4. DIMENSIONS IN MILLIMETERS, (...) - FOR REFERENCE," at 110.3,85 h2.5
  text "TOLERANCE ARE: +-0.15; HOLES: +- 0.05." at 117.45,80.95 h2.5
  text "5. LIQUID PHOTO IMAGABLE SOLDERMASK ENTHRONE DSR3241" at 110.35,76.9 h2.5
  text "OR ALTERNATIVE." at 117.45,72.95 h2.5
  text "6.  FOR REF ONLY: THIS BOARD HAS SMD ON BOTH SIDES." at 110.35,68.9 h2.5
  text "7.  THE FINISH OF THE BOARD IS HASL." at 110.2,62.5 h2.5
  text "8. PCB stackup:" at 110.2,56.8 h2.5
  text "B" at -132.974,25.431 h1.78
  text "B" at 255.646,25.431 h1.78
  text "C" at -132.974,-45.181 h1.78
  text "C" at 255.646,-45.181 h1.78
  text "D" at -132.974,-115.285 h1.78
  text "D" at 255.646,-115.285 h1.78
  text "TITLE:" at 105.7,-115.8 h1.2
  text "SIZE:" at 105.7,-125.55 h1.2
  text "DWG NO:" at 120.7,-125.55 h1.2
  text "REV:" at 240.2,-125.55 h1.2
  text ".Project_Version" at 245.4,-126.7 h2.5
  text "A3" at 111.7,-130.3 h2.5
  text "DATE:" at 105.7,-135.55 h1.2
  text "PCB DESIGNER:" at 191.2,-135.55 h1.2
  text ".PRINT_DATE" at 119.2,-136.8 h2.5
  text "FILE NAME:" at 105.7,-140.55 h1.2
  text "SHEET:" at 190.95,-140.55 h1.2
  text ".PCB_FILE_NAME_NO_PATH" at 119.2,-141.8 h2.5
  text "1 OF 1" at 208.95,-142.05 h2.5
  text "1" at -110.842,-146.832 h1.78
  text "2" at -61.803,-146.832 h1.78
  text "3" at -12.544,-146.832 h1.78
  text "4" at 36.749,-146.832 h1.78
  text "5" at 86.025,-146.832 h1.78
  text "6" at 135.047,-146.832 h1.78
  text "7" at 184.577,-146.832 h1.78
  text "8" at 233.599,-146.832 h1.78

## Dimensions
78.892,-12.446 to 84.165,-54.94 on Dimensions
78.892,-12.446 to 84.165,30.06 on Dimensions
-38.835,16.06 to -38.835,-38.94 on Dimensions
-38.835,-38.94 to 61.165,-38.94 on Dimensions
-38.835,16.06 to 61.165,16.06 on Dimensions
-49.835,30.06 to 84.165,30.06 on Dimensions
-49.835,30.06 to -49.835,-54.94 on Dimensions

## Text inside footprints (layer, text, board x,y; h text height)
C16A: Bottom Assembly "+" at -29.662,-28.501 h0.9 r270
C16B: Bottom Assembly "+" at -29.662,12.926 h0.9 r270
C20A: Bottom Assembly "+" at -25.862,-34.353 h0.9 r90
C20B: Bottom Assembly "+" at -25.862,7.074 h0.9 r90
D1A: Top Assembly "1" at -13.778,-31.101 h1.59
D1B: Top Assembly "1" at -13.778,10.327 h1.59
HG2: Top Assembly "R" at 80.317,-13.796 h0.5 r90; Top Assembly "G" at 80.267,-11.471 h0.5 r90
S1: Top Overlay "OFF ON" at 76.2,1.321 h1.5 r90
X2: Top Assembly "2" at 47.267,2.441 h1 r90; Top Assembly "1" at 47.267,-1.059 h1 r90
X3: Top Assembly "2" at 47.285,17.205 h1 r90; Top Assembly "1" at 47.285,13.705 h1 r90